# Altium PCB Atomic_Type_A.PcbDoc
Units mm, origin at the board's own origin, x right, y up, seen from the top; angles counter-clockwise.
Board outline 20 x 43.8 mm, 2 copper layers (Top Layer, Bottom Layer), stack 0.98 mm thick; 2 components, 8 nets, 22 pads, 0 vias.
Unrouted connection lines stored in the file: 6.
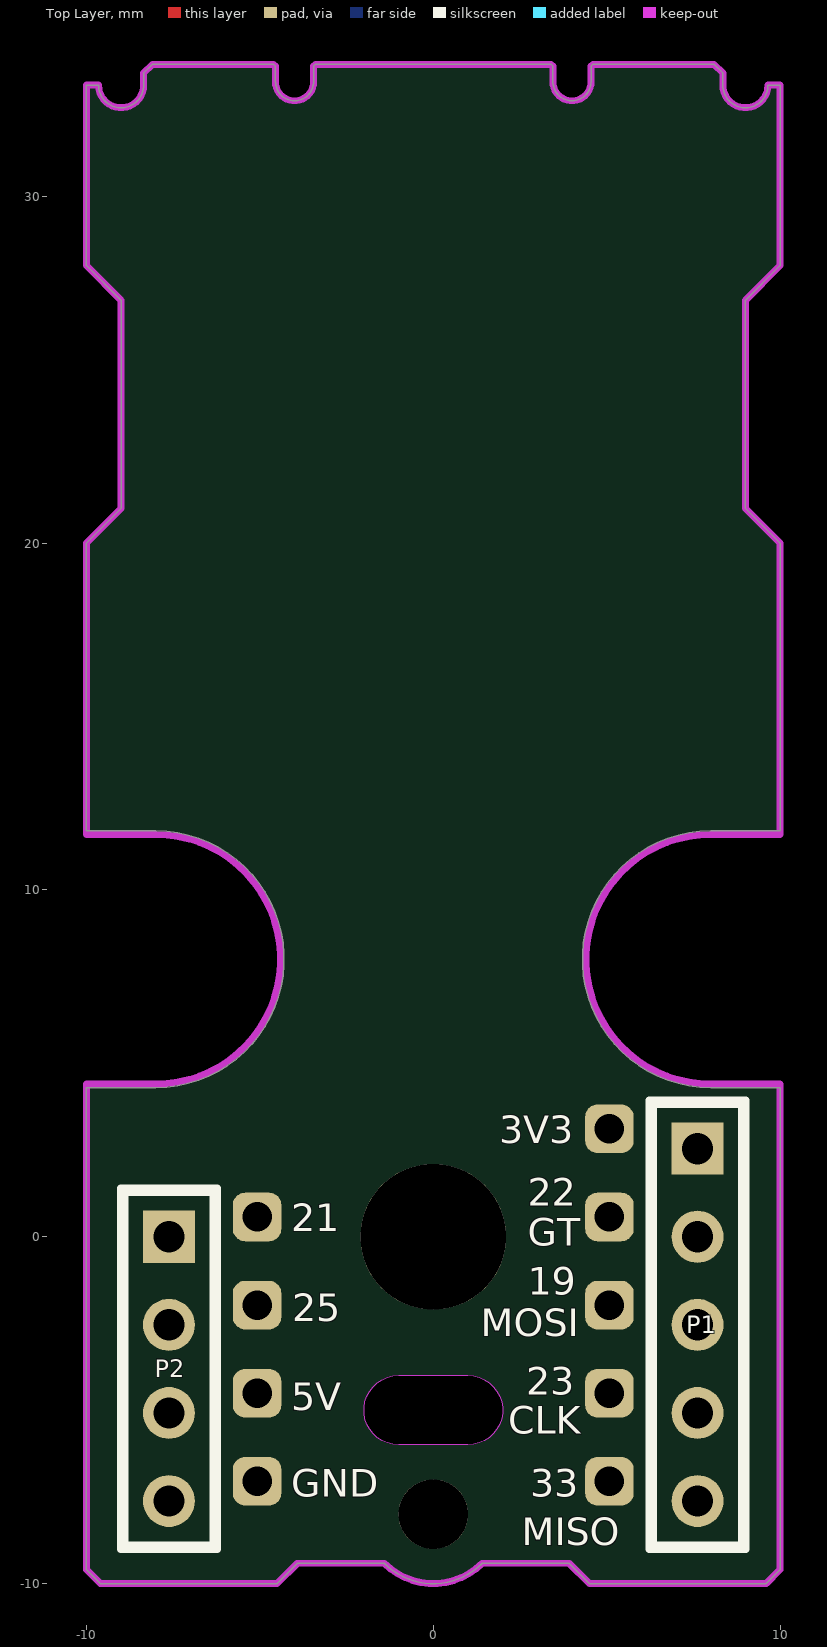
[diagram p0: Top Layer view]
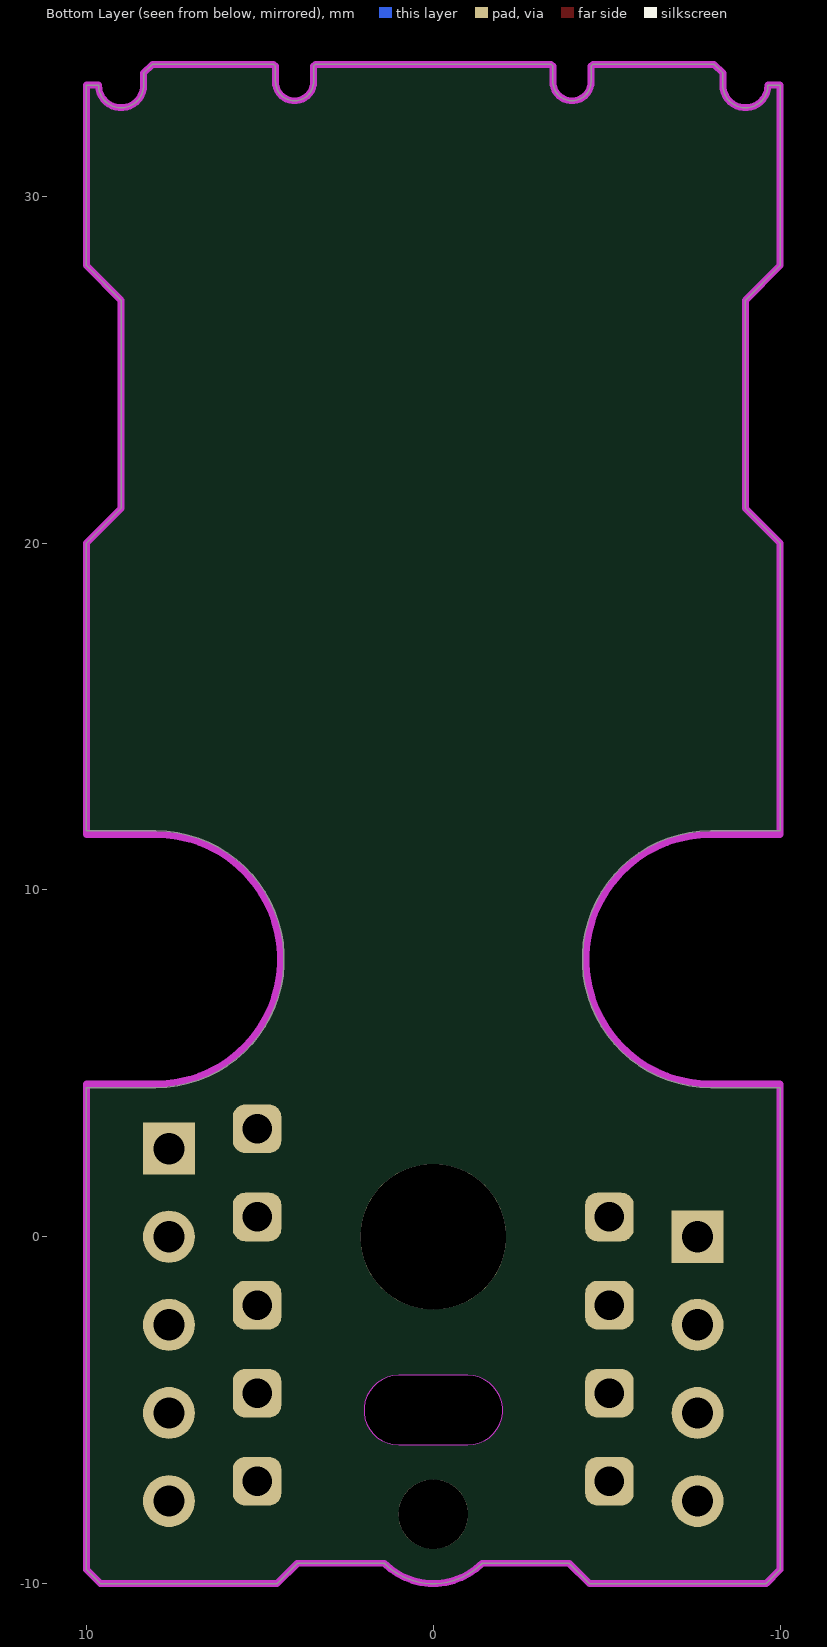
[diagram p1: Bottom Layer view, seen from below]

## Layer stack, top to bottom
Top Solder: solder mask 0.0102, Solder Resist, Dk 3.5
Top Layer: signal copper 0.0175
Dielectric1: core 0.9447, FR-4, Dk 4.2
Bottom Layer: signal copper 0.0175
Bottom Solder: solder mask 0.0102, Solder Resist, Dk 3.5

## Board outline
-10,-8.8 -10,4.3 -8,4.3 ccw(c-8,8) -8,11.7 -10,11.7 -10,20 -9,21 -9,27 -10,28 -10,33.2 -9.65,33.2 ccw(c-9,33.2) -8.35,33.2 -8.35,33.55 -8.1,33.8 -4.6,33.8 -4.55,33.75 -4.55,33.3 ccw(c-4,33.3) -3.45,33.3 -3.45,33.75 -3.4,33.8 3.4,33.8 3.45,33.75 3.45,33.3 ccw(c4,33.3) 4.55,33.3 4.55,33.75 4.6,33.8 8.1,33.8 8.35,33.55 8.35,33.2 ccw(c9,33.2) 9.65,33.2 10,33.2 10,28 9,27 9,21 10,20 10,11.7 8,11.7 ccw(c8,8) 8,4.3 10,4.3 10,-9.6 9.6,-10 4.5,-10 3.914,-9.414 1.414,-9.414 cw(c0,-8) -1.414,-9.414 -3.914,-9.414 -4.5,-10 -9.6,-10 -10,-9.6
cut-out: -1,-6 cw(c-1,-5) -1,-4 1,-4 cw(c1,-5) 1,-6

## Design rules (kind name [scope] priority, off if disabled: settings)
Clearance [All] p1: gap=0.2 ignorepadtopadclearanceinfootprint=FALSE
PlaneConnect [All] p1: planeconnectstyle=Direct reliefexpansion=0.508 reliefentries=4 reliefconductorwidth=0.254 reliefairgap=0.254
PolygonConnect [All] p1: thpad.connectstyle=Relief thpad.reliefconductorwidth=0.3 thpad.reliefentries=4 thpad.polygonreliefangle="90 Angle" thpad.airgapwidth=0.254 smdpad.connectstyle=Relief smdpad.reliefconductorwidth=0.3 smdpad.reliefentries=4 smdpad.polygonreliefangle="90 Angle" smdpad.airgapwidth=0.254 via.connectstyle=Direct via.reliefconductorwidth=0.254 via.reliefentries=4 via.polygonreliefangle="90 Angle" via.airgapwidth=0.254
RoomDefinition AtomicTF [InComponentClass('AtomicTF')] p1: confinementstyle=ConfineIn formatcopy=TRUE lockcomponents=FALSE outline -91.656,-84.4 -40.856,-84.4 -40.856,-59 -91.656,-59
RoutingVias [All] p1: holewidth=0.3 width=0.6 viastyle="Through Hole" minholewidth=0.3 minwidth=0.6 maxholewidth=0.3 maxwidth=0.6
SolderMaskExpansion [All] p1: expansion=0.102 istentingtop=FALSE
Width [All] p1: maxlimit=0.889 minlimit=0.152 preferedwidth=0.381 minimp=50.000000 maximp=50.000000 favimp=50.000000
29 further rules are at their usual default settings.

## Components (designator, comment, footprint, x,y, rotation, side; value= is the part's Value field where it differs from the comment)
P1 "Header 5" HDR1X5 7.62,2.54 r270 top
P2 "Header 4" HDR1X4 -7.62,0 r270 top

## Footprints (in the part's own frame and the unit in brackets; to place one, negate y for a bottom-side part, rotate by r counter-clockwise, add the part's x,y. Pads: shape width x height; smd on the part's side, far side on the other; paste and mask are expansions set on the pad)
HDR1X4 [mm] "Connector; Header; 4 Position"
  rect 1.5x1.5 hole 0.9: 1(0,0)
  round 1.5 hole 0.9: 2(2.54,0) 3(5.08,0) 4(7.62,0)
  silkscreen extent -1.27,-1.27 8.89,1.27
HDR1X5 [mm] "Connector; Header; 5 Position"
  rect 1.5x1.5 hole 0.9: 1(0,0)
  round 1.5 hole 0.9: 2(2.54,0) 3(5.08,0) 4(7.62,0) 5(10.16,0)
  silkscreen extent -1.27,-1.27 11.43,1.27

## Part data
P1: "Header, 5-Pin", LatestRevisionDate=17-Jul-2002, LatestRevisionNote="Re-released for DXP Platform.", Publisher="Altium Limited"
P2: "Header, 4-Pin", LatestRevisionDate=17-Jul-2002, LatestRevisionNote="Re-released for DXP Platform.", Publisher="Altium Limited"

## Free pads (board coordinates)
  round 3.9 on Top Solder: 35(0,-8)
  round 3.9 on Bottom Solder: 35(0,-8)
  rrect50% 1.4x1.4 hole 0.85: ""(-5.08,-7.05) ""(-5.08,-4.51) ""(-5.08,-1.97) ""(-5.08,0.57) ""(5.08,-7.05) ""(5.08,-4.51) ""(5.08,-1.97) ""(5.08,0.57) ""(5.08,3.11)
  round 2 hole 2: ""(0,-8)
  round 4.2 hole 4.2: ""(0,0)

## Nets (pads, with @x,y where several pads share a name; then routed paths per layer and width w, separated by ;. In a path a pad name is that pad's centre, name@x,y a point inside that pad or via, vN(x,y) a via of type N, cw(c..) or ccw(c..) an arc to the next point about the centre after c; other vN are vias at no path point)
+3.3V: P1.1 pad.@5.08,3.11
+5VIN: P2.3 pad.@-5.08,-4.51
CLK: P1.4 pad.@5.08,-4.51
GND: P2.4 pad.@-5.08,-7.05
GPS_T: P1.2 pad.@5.08,0.57
MISO: P1.5 pad.@5.08,-7.05
MOSI: P1.3 pad.@5.08,-1.97
NetRp1_4: 
pads on no net: P2.1 P2.2

## Keep-outs
Keep-Out Layer:
  lines w0.2: -10,32.8 -10,33.2 -9.65,33.2 ccw(c-9,33.2) -8.35,33.2 -8.35,33.55 -8.1,33.8 -7.5,33.8 -4.6,33.8 -4.55,33.75 -4.55,33.3 ccw(c-4,33.3) -3.45,33.3 -3.45,33.75 -3.4,33.8 0,33.8 3.4,33.8 3.45,33.75 3.45,33.3 ccw(c4,33.3) 4.55,33.3 4.55,33.75 4.6,33.8 7.5,33.8 8.1,33.8 8.35,33.55 8.35,33.2 ccw(c9,33.2) 9.65,33.2 10,33.2 10,28 9,27 9,21 10,20 10,19.25 10,11.6 8.6,11.6 8,11.6 ccw(c8,8) 8,4.4 8.6,4.4 10,4.4 10,-0.6 10,-4.9 10,-9.6 9.6,-10 4.5,-10 3.914,-9.414 1.414,-9.414 cw(c0,-8) -1.414,-9.414 -1.914,-9.414 -3.914,-9.414 -4.5,-10 -9.6,-10 -10,-9.6 -10,-8.8 -10,-7.757 -10,1.49 -10,4.4 -8.6,4.4 -8,4.4 ccw(c-8,8) -8,11.6 -8.6,11.6 -10,11.6 -10,19.25 -10,20 -9,21 -9,27 -10,28 -10,33

## Silkscreen, mask and mechanical layers (free items; w line width, h text height)
Top Overlay:
  lines w0.2: -9.02,-9.02 -6.22,-9.02 -6.22,1.4 -9.02,1.4 -9.02,-9.02 ; 6.22,-9.02 6.22,3.94 9.02,3.94 9.02,-9.02 6.22,-9.02
  text "3V3" at 1.9,2.7 h0.8
  text "22" at 2.725,0.9 h0.8
  text "21" at -4.089,0.152 h0.8
  text "GT" at 2.718,-0.254 h0.8
  text "19" at 2.725,-1.675 h0.8
  text "25" at -4.064,-2.438 h0.8
  text "MOSI" at 1.375,-2.875 h0.8
  text "23" at 2.675,-4.55 h0.8
  text "5V" at -4.1,-5 h0.8
  text "CLK" at 2.16,-5.684 h0.8
  text "GND" at -4.1,-7.5 h0.8
  text "33" at 2.8,-7.5 h0.8
  text "MISO" at 2.55,-8.9 h0.8
Mechanical 1:
  lines w0.2: -10,-9.6 -10,-8.8 -10,-7.757 -10,1.49 -10,4.3 -8,4.3 ccw(c-8,8) -8,11.7 -10,11.7 -10,19.25 -10,20 -9,21 -9,27 -10,28 -10,33.2 -9.65,33.2 ccw(c-9,33.2) -8.35,33.2 -8.35,33.55 -8.1,33.8 -7.5,33.8 -4.6,33.8 -4.55,33.75 -4.55,33.3 ccw(c-4,33.3) -3.45,33.3 -3.45,33.75 -3.4,33.8 0,33.8 3.4,33.8 3.45,33.75 3.45,33.3 ccw(c4,33.3) 4.55,33.3 4.55,33.75 4.6,33.8 7.5,33.8 8.1,33.8 8.35,33.55 8.35,33.2 ccw(c9,33.2) 9.65,33.2 10,33.2 10,28 9,27 9,21 10,20 10,19.25 10,11.7 8,11.7 ccw(c8,8) 8,4.3 10,4.3 10,-0.6 10,-4.9 10,-9.6 9.6,-10 4.5,-10 3.914,-9.414 1.414,-9.414 cw(c0,-8) -1.414,-9.414 -1.914,-9.414 -3.914,-9.414 -4.5,-10 -9.6,-10 -10,-9.6 ; -1,-6 cw(c-1,-5) -1,-4 1,-4 cw(c1,-5) 1,-6 -1,-6